# EAGLE board xbee_2017 (EAGLE 7.7.0)
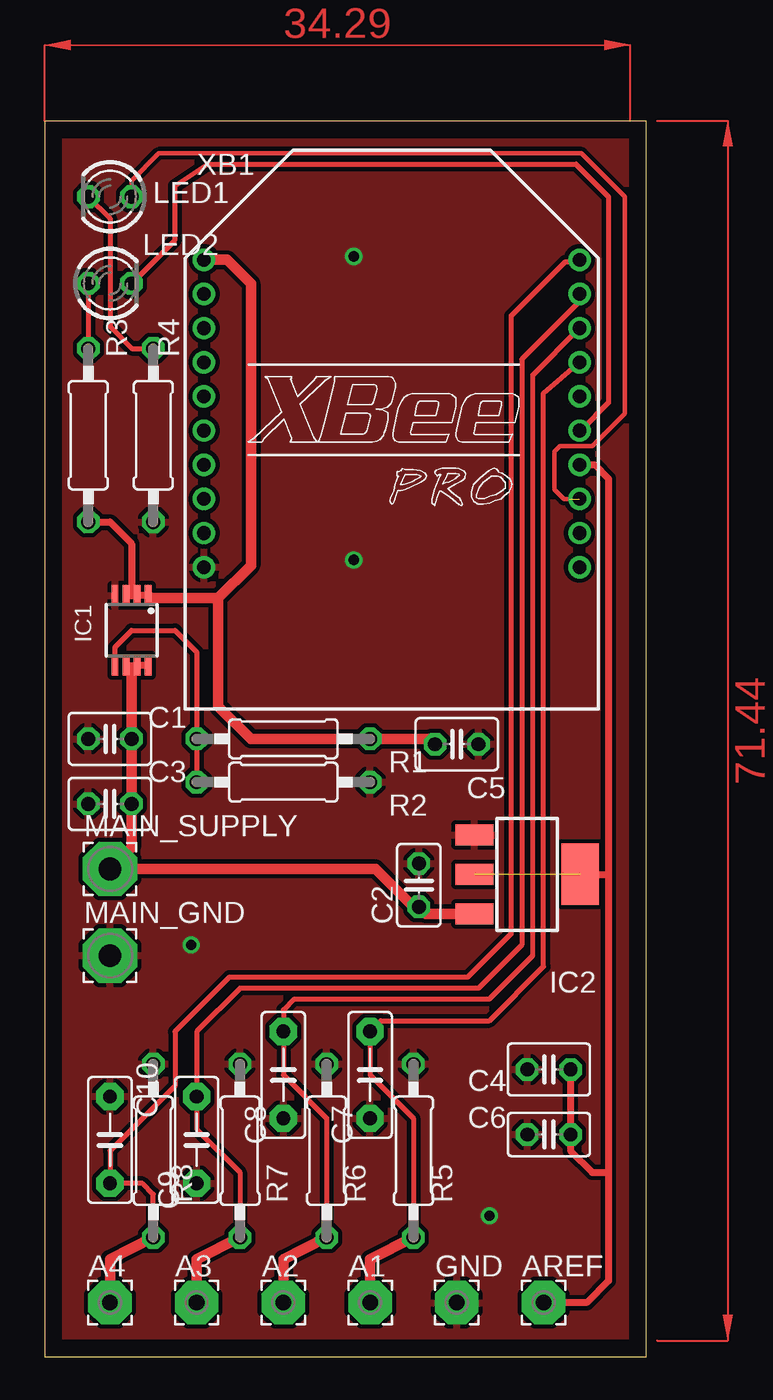
[diagram p0: board, top side]
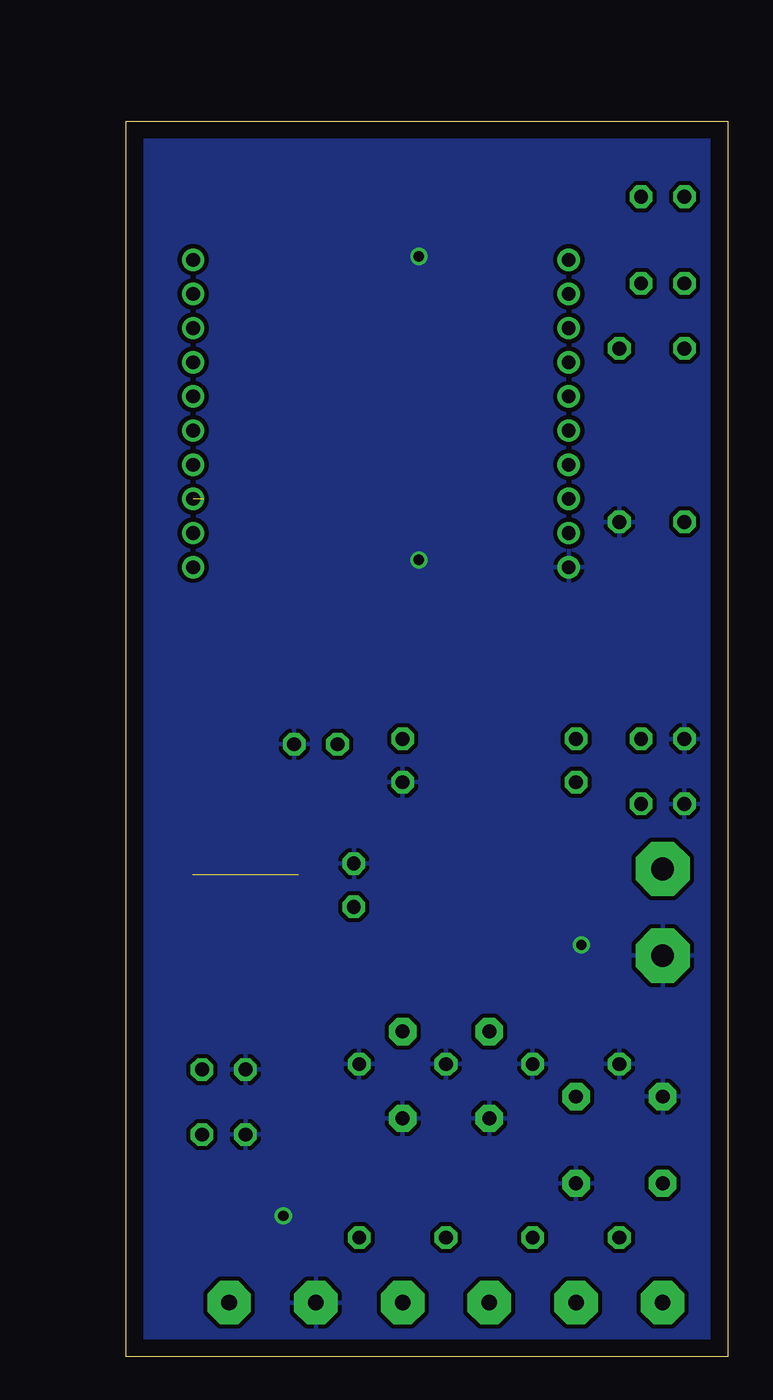
[diagram p1: board, bottom side, seen from below]

Size 35.23 x 72.38 mm. Coordinates in mm from the lower left corner, seen from the top.
Outline: 0,0 35.23,0 35.23,72.38 0,72.38 0,0
Copper layers (1*16): Top 0.035mm / dielectric 1.5mm / Bottom 0.035mm
Design rules "default": minimum track width 10mil, minimum drill 24mil, track to track 8mil, track to pad 8mil, pad to pad 8mil, via to via 8mil, smd to smd 8mil, copper to edge 40mil, drill to drill 8mil, minimum pad ring 10mil, minimum via ring 8mil, stop-mask expansion 4mil, vias tented up to drill 0mil, thermal gap 10mil
Net classes: 0 default: width 0.305 mm, drill 0.508 mm, clearance 0.254 mm

## Footprints (pad centres in the part's own frame; a part is rotated, then mirrored left to right if it is on the bottom)
2,54/0,9 = drill 0.914 pad 2.54 octagon: 1 0,0
C025-030X050 = drill 0.813 octagon: 1 -1.27,0; 2 1.27,0
C025-025X050 = drill 0.813 octagon: 1 -1.27,0; 2 1.27,0
C5B2.5 = drill 0.813 pad 1.6 octagon: 1 -2.54,0; 2 2.54,0
MSOP8 = smd 0.4 x 1.2: 1 -0.975,-2.05; 2 -0.325,-2.05; 3 0.325,-2.05; 4 0.975,-2.05; 5 0.975,2.05; 6 0.325,2.05; 7 -0.325,2.05; 8 -0.975,2.05
SOT223 = smd 1.219 x 2.235: 1 -2.311,-3.099; 2 0,-3.099; 3 2.311,-3.099 | smd 3.6 x 2.2: TAB 0,3.099
LED3MM = drill 0.813 octagon: A -1.27,0; K 1.27,0
3,17/1,3 = drill 1.321 pad 3.175 octagon: 1 0,0
0207/10 = drill 0.813 octagon: 1 -5.08,0; 2 5.08,0
XBEE-PRO = drill 0.8 pad 1.27: 1 -11,9; 2 -11,7; 3 -11,5; 4 -11,3; 5 -11,1; 6 -11,-1; 7 -11,-3; 8 -11,-5; 9 -11,-7; 10 -11,-9; 11 11,-9; 12 11,-7; 13 11,-5; 14 11,-3; 15 11,-1; 16 11,1; 17 11,3; 18 11,5; 19 11,7; 20 11,9

## Placement (x,y rotation side)
A1  [2,54/0,9]  19.05,3.17 0 top
A2  [2,54/0,9]  13.97,3.17 0 top
A3  [2,54/0,9]  8.89,3.17 0 top
A4  [2,54/0,9]  3.81,3.17 0 top
AREF  [2,54/0,9]  29.21,3.17 0 top
C1  10uF/16V  [C025-030X050]  3.81,36.2 180 top
C2  220nF  [C025-025X050]  21.91,27.62 90 top
C3  10uF/16V  [C025-030X050]  3.81,32.38 180 top
C4  10uF/16V  [C025-030X050]  29.53,16.83 180 top
C5  10uF/16V  [C025-030X050]  24.13,35.88 0 top
C6  220nF  [C025-025X050]  29.53,13.02 180 top
C7  470nF  [C5B2.5]  19.05,16.51 270 top
C8  470nF  [C5B2.5]  13.97,16.51 270 top
C9  470nF  [C5B2.5]  8.89,12.7 270 top
C10  470nF  [C5B2.5]  3.81,12.7 270 top
GND  [2,54/0,9]  24.13,3.17 0 top
IC1  LTC2602CMS8  [MSOP8]  5.08,42.55 180 top
IC2  LM1117IMPX-3.3  [SOT223]  28.26,28.26 270 top
LED1  red  [LED3MM]  3.81,67.94 180 top
LED2  red  [LED3MM]  3.81,62.87 0 top
MAIN_GND  [3,17/1,3]  3.81,23.5 0 top
MAIN_SUPPLY  [3,17/1,3]  3.81,28.58 0 top
R1  140k 1%  [0207/10]  13.97,36.2 0 top
R2  78.7k 1%  [0207/10]  13.97,33.66 0 top
R3  470R  [0207/10]  6.35,53.98 90 top
R4  470R  [0207/10]  2.54,53.98 270 top
R5  10k  [0207/10]  21.59,12.06 90 top
R6  10k  [0207/10]  16.51,12.06 90 top
R7  10k  [0207/10]  11.43,12.06 270 top
R8  10k  [0207/10]  6.35,12.06 90 top
XB1  XBEE-PRO  [XBEE-PRO]  20.32,55.24 0 top

## Library data of the parts
A1-A4 AREF GND MAIN_GND MAIN_SUPPLY = wirepad
C1-C6 R1-R8 = resistor
C7-C10 = capacitor-wima
IC1 = linear-technology; MPN: LTC2602CMS8; OC_FARNELL: 1330944; OC_NEWARK: 56M5818
IC2 = lm1117
LED1 LED2 = led
XB1 = maxstream; MPN: XBP24-AWI-001; OC_FARNELL: 1337916; OC_NEWARK: 42M2667

## Nets
GND: C1.2 C2.2 C3.2 C4.2 C5.2 C6.2 C7.2 C8.2 C9.2 C10.1 GND.1 IC1.4 IC2.1 MAIN_GND.1 R2.2 R3.1 R5.2 R6.2 R7.1 R8.2 XB1.10
N$1: IC1.5 R1.1 R2.1
N$3: LED1.K R3.2
N$4: LED2.A R4.1
N$5: LED2.K XB1.15
N$6: LED1.A XB1.13
N$7: A2.1 C8.1 R6.1 XB1.18
N$9: A1.1 C7.1 R5.1 XB1.17
N$10: A4.1 C10.2 R8.1 XB1.20
N$11: A3.1 C9.1 R7.2 XB1.19
VCC: C1.1 C2.1 C3.1 IC1.6 IC1.7 IC1.8 IC2.3 MAIN_SUPPLY.1
VOUT_3.3: C5.1 IC1.1 IC1.2 IC1.3 R1.2 R4.2 XB1.1
VREF: AREF.1 C4.1 C6.1 IC2.2 IC2.TAB XB1.14

## Tracks (layer width: path | path; a pad name or v marks a point on that pad's centre or on a via)
GND  (via drill 0.6)
  other vias: 8.57,24.13 18.1,64.45 18.1,46.67 26.04,8.26
  pour Top: 35.56,73.02 0,73.02 0,-0.63 35.56,-0.63
  pour Bottom: -0.32,72.71 35.88,72.71 35.88,72.39 35.88,-0.63 -0.32,-0.63 -0.32,0.63
N$1
  Top 0.305: IC1.5 4.11,41.57 5.08,42.55 7.62,42.55 8.89,41.27 R1.1 R2.1
N$3
  Top 0.305: LED1.K 3.81,66.67 3.81,60.32 5.08,59.05 R3.2
N$4
  Top 0.305: LED2.A R4.1
N$5
  Top 0.305: LED2.K 7.62,65.41 7.62,68.58 9.53,69.85 31.11,69.85 33.02,67.94 33.02,55.88 31.38,54.25 XB1.15
N$6  (1 unrouted)
  Top 0.254: 30.72,50.25 30.4,50.25 29.84,50.8 29.84,53.02 30.16,53.34 32.07,53.34 33.97,55.24 33.97,67.94 31.43,70.48 6.67,70.48 5.08,68.9 LED1.A
N$7
  Top 0.305: XB1.18 28.57,57.5 28.57,23.5 26.04,20.95 14.61,20.95 13.97,20.32 C8.1 13.97,16.51 16.51,13.97 R6.1
  Top 0.61: R6.1 13.97,5.71 A2.1
N$9
  Top 0.305: XB1.17 29.21,56.45 29.21,22.86 26.04,19.69 19.68,19.69 C7.1 19.05,16.51 21.59,13.97 R5.1
  Top 0.61: R5.1 19.05,5.71 A1.1
N$10
  Top 0.305: R8.1 6.35,9.53 5.71,10.16 C10.2 3.81,12.06 7.62,15.87 7.62,19.05 10.79,22.23 24.77,22.23 27.3,24.77 27.3,60.96 30.48,64.13 31.21,64.13 XB1.20
  Top 0.61: R8.1 3.81,5.71 A4.1
N$11
  Top 0.305: XB1.19 31.32,61.8 27.94,58.42 27.94,24.13 25.4,21.59 11.43,21.59 8.89,19.05 C9.1 8.89,13.33 11.43,10.79 R7.2
  Top 0.61: R7.2 8.89,5.71 A3.1
VCC
  Top 0.406: IC1.6 IC1.7 IC1.8
  Top 0.61: IC1.7 5.08,40.01 C1.1 C3.1 5.08,29.84 MAIN_SUPPLY.1 19.37,28.58 21.59,26.35 C2.1 22.31,25.95 IC2.3
VOUT_3.3
  Top 0.406: IC1.1 IC1.2 | IC1.3 IC1.2 | R4.2 3.81,48.9 5.08,47.62 5.08,44.92 IC1.2
  Top 0.61: XB1.1 10.68,64.24 12.06,62.87 12.06,46.36 10.16,44.45 | C5.1 22.54,36.2 R1.2 12.06,36.2 10.16,38.1 10.16,44.45 | 10.16,44.45 6.2,44.45 IC1.1
VREF  (1 unrouted)
  Top 0.406: XB1.14 32.21,52.25 33.02,51.44 33.02,28.26 | 33.02,28.26 33.02,10.79 | 33.02,10.79 33.02,4.45 31.75,3.17 AREF.1 | C4.1 C6.1 30.8,12.06 32.07,10.79 33.02,10.79 | IC2.TAB 33.02,28.26
(copper drawn outside any net)
  shapes: Top area x2